# Altium PCB ExtBoard 20Pin.PcbDoc
Units mm, origin at the board's own origin, x right, y up, seen from the top; angles counter-clockwise.
Board outline 152.4 x 101.6 mm, 2 copper layers (Top Layer, Bottom Layer); 9 components, 20 nets, 40 pads, 3 vias.
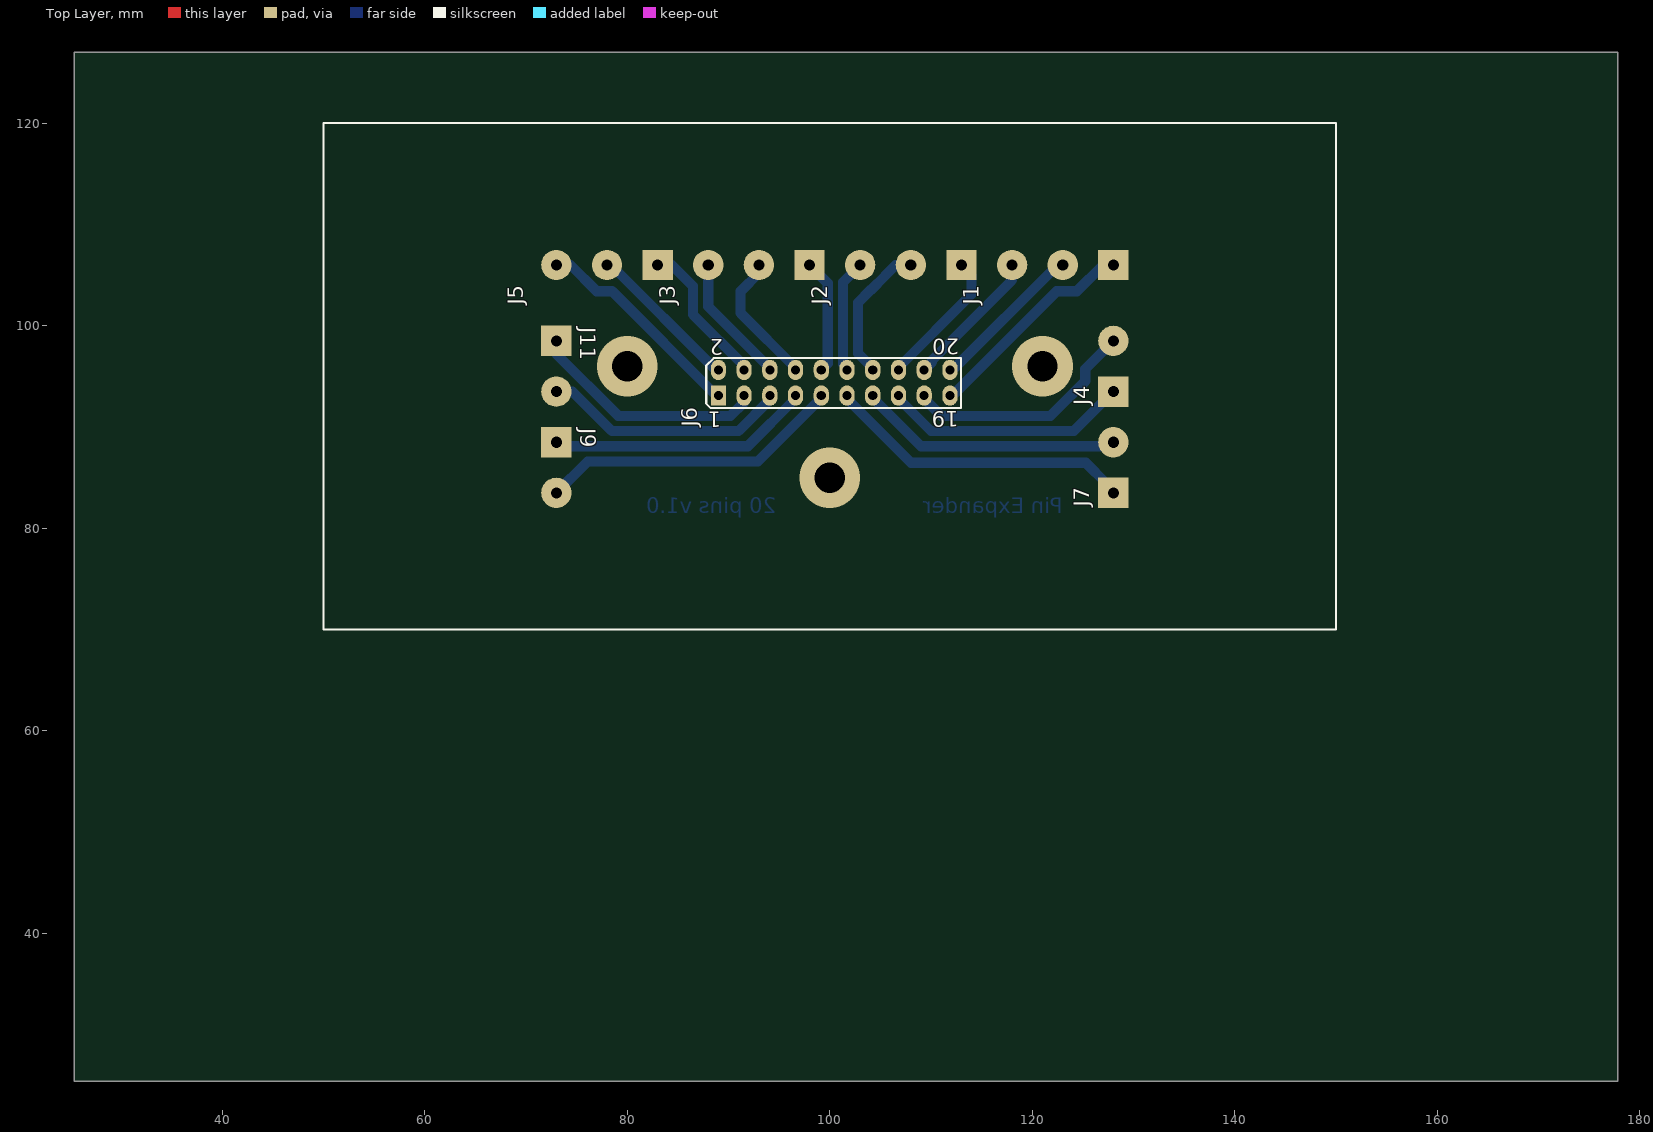
[diagram p0: Top Layer view]
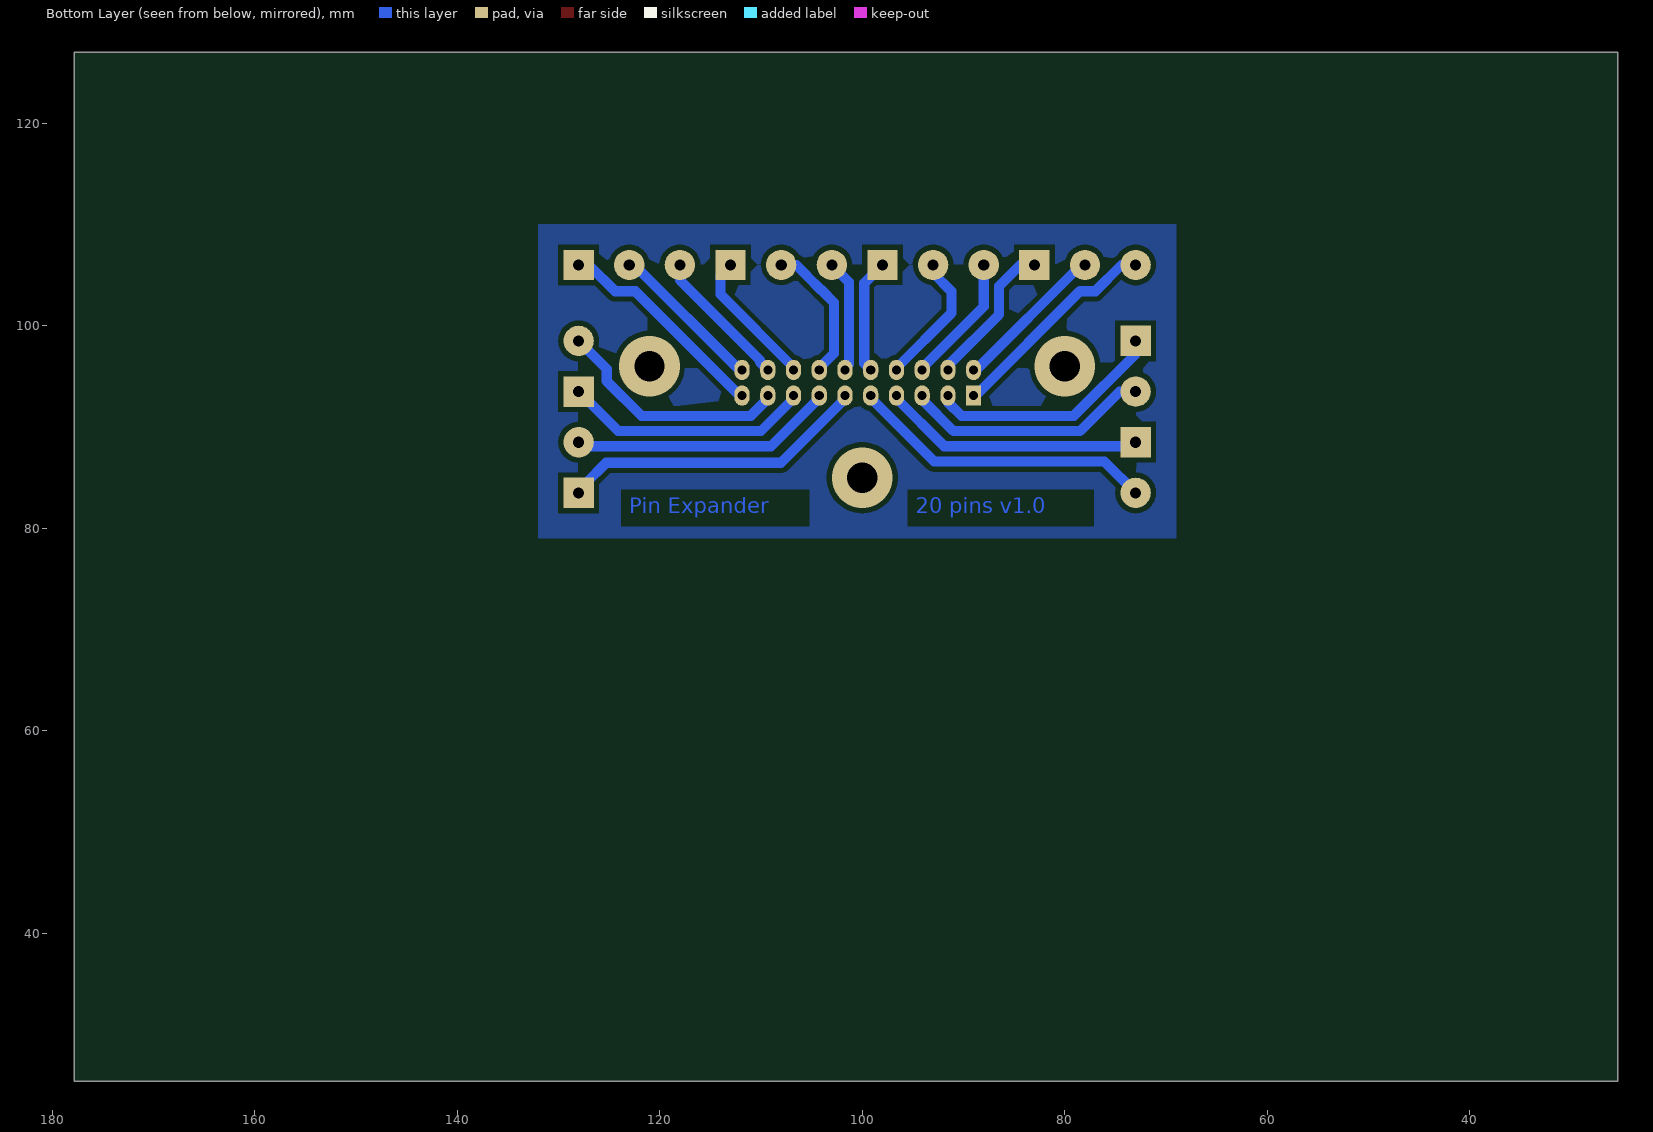
[diagram p1: Bottom Layer view, seen from below]
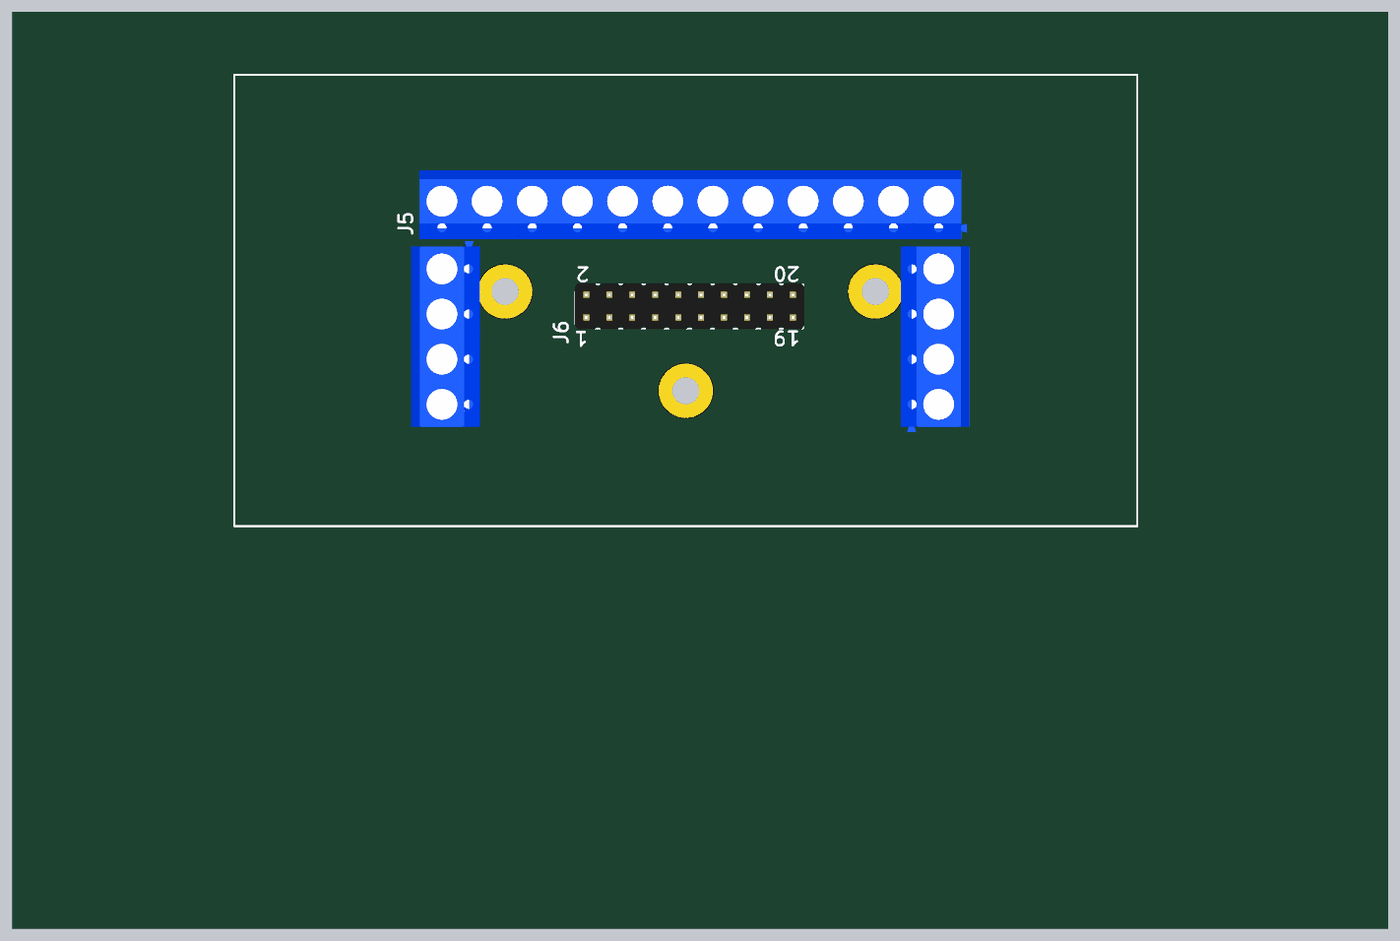
[diagram p2: 3D render of the assembled board from above, using the file's embedded part models]

## Layer stack, top to bottom
Top Solder: solder mask 0.0102, Solder Resist, Dk 3.5
Top Layer: signal copper 0.0356
Dielectric 1: dielectric 0.32, FR-4, Dk 4.8
Bottom Layer: signal copper 0.0356
Bottom Solder: solder mask 0.0102, Solder Resist, Dk 3.5

## Board outline
25.4,25.4 177.8,25.4 177.8,127 25.4,127

## Design rules (kind name [scope] priority, off if disabled: settings)
Clearance [All] p1: gap=0.5
PolygonConnect [All] p1: connectstyle=Relief reliefconductorwidth=0.254 reliefentries=4 polygonreliefangle="90 Angle" airgapwidth=0.254
RoutingVias [All] p1: holewidth=0.711 width=1.27 viastyle="Through Hole" minholewidth=0.711 minwidth=1.27 maxholewidth=0.711 maxwidth=1.27
SolderMaskExpansion [All] p1: expansion=0.102
Width [All] p1: maxlimit=2 minlimit=0.5 preferedwidth=1
29 further rules are at their usual default settings.

## Components (designator, comment, footprint, x,y, rotation, side; value= is the part's Value field where it differs from the comment)
J1 "Connector" "DG301 5mm 3p" 128,106 r180 top
J2 "Connector" "DG301 5mm 3p" 113,106 r180 top
J3 "Connector" "DG301 5mm 3p" 98,106 r180 top
J4 "Connector" "DG301 5mm 2p" 128,93.5 r90 top
J5 "Connector" "DG301 5mm 3p" 83,106 r180 top
J6 "Connector" "LINE 2.54 x 20D (2 x 10)" 89,93.1 r90 top
J7 "Connector" "DG301 5mm 2p" 128,83.5 r90 top
J9 "Connector" "DG301 5mm 2p" 73,88.5 r270 top
J11 "Connector" "DG301 5mm 2p" 73,98.5 r270 top

## Footprints (in the part's own frame and the unit in brackets; to place one, negate y for a bottom-side part, rotate by r counter-clockwise, add the part's x,y. Pads: shape width x height; smd on the part's side, far side on the other; paste and mask are expansions set on the pad)
"DG301 5mm 2p" [mm]
  rect 3x3 hole 1.1: 1(0,0)
  round 3 hole 1.1: 2(5,0)
  body extent -3.1,-3.4 7.5,4.2, height 10
"DG301 5mm 3p" [mm]
  rect 3x3 hole 1.1: 1(0,0)
  round 3 hole 1.1: 2(5,0) 3(10,0)
  body extent -3.1,-3.4 12.5,4.2, height 10
"LINE 2.54 x 20D (2 x 10)" [mm]
  rect 2x1.5 hole 0.9: 1(0,0)
  oval 2x1.5 hole 0.9: 2(2.54,0) 3(0,-2.54) 4(2.54,-2.54) 5(0,-5.08) 6(2.54,-5.08) 7(0,-7.62) 8(2.54,-7.62) 9(0,-10.16) 10(2.54,-10.16) 11(0,-12.7) 12(2.54,-12.7) 13(0,-15.24) 14(2.54,-15.24) 15(0,-17.78) 16(2.54,-17.78) 17(0,-20.32) 18(2.54,-20.32) 19(0,-22.86) 20(2.54,-22.86)
  silkscreen extent -1.2,-23.97 3.7,1.2, body extent -1.27,-24.12 3.81,1.28, height 8.5

## Part data
J1 J2 J3 J5: library part DG301-5.0-3P12, "DG301 series"
J4 J7 J9 J11: library part DG301-5.0-2P12, "DG301 series"
J6: library part "PLD-20 (2 x 10)", "Vert, Dbl line, Male"

## Via types
v1: diameter 6, hole 3, Top Layer to Bottom Layer, 3 vias

## Nets (pads, with @x,y where several pads share a name; then routed paths per layer and width w, separated by ;. In a path a pad name is that pad's centre, name@x,y a point inside that pad or via, vN(x,y) a via of type N, cw(c..) or ccw(c..) an arc to the next point about the centre after c; other vN are vias at no path point)
P1: J5.3 J6.1 | length 21.2
  Bottom Layer w1: J5.3 74.4,106 76.992,103.408 78.508,103.408 J6.1@88.815,93.1
P2: J5.2 J6.2 | length 15.3
  Bottom Layer w1: J5.2 78.4,106 88.7,95.7 88.94,95.7 J6.2
P3: J6.3 J11.1 | length 22.9
  Bottom Layer w1: J11.1 73,97.2 79.1,91.1 90.2,91.1 J6.3@91.54,92.44
P4: J5.1 J6.4 | length 14.7
  Bottom Layer w1: J5.1 84.4,106 86.5,103.9 86.5,101.099 91.54,96.059 J6.4
P5: J6.5 J11.2 | length 24
  Bottom Layer w1: J11.2 74.579,93.5 78.479,89.6 91,89.6 J6.5@94.08,92.68
P6: J3.3 J6.6 | length 12.8
  Bottom Layer w1: J3.3 88,101.905 J6.6@94.172,95.732
P7: J6.7 J9.1 | length 25.7
  Bottom Layer w1: J9.1 73.4,88.1 91.9,88.1 J6.7@96.62,92.82
P8: J3.2 J6.8 | length 13.2
  Bottom Layer w1: J3.2 93,105.2 91.2,103.4 91.2,101.245 J6.8@96.62,95.825
P9: J6.9 J9.2 | length 30
  Bottom Layer w1: J9.2 76.1,86.6 92.9,86.6 J6.9@99.16,92.86
P10: J3.1 J6.10 | length 11.4
  Bottom Layer w1: J3.1 99.8,104.2 99.8,96.28 J6.10
P11: J6.11 J7.1 | length 29.1
  Bottom Layer w1: J6.11@101.7,92.8 108.025,86.475 125.275,86.475 J7.1@127.325,84.425
P12: J2.3 J6.12 | length 11
  Bottom Layer w1: J6.12@101.7,95.825 101.3,96.225 101.3,104.3 J2.3
P13: J6.13 J7.2 | length 25.9
  Bottom Layer w1: J6.13@104.24,92.86 109,88.1 127.6,88.1 J7.2
P14: J2.2 J6.14 | length 14
  Bottom Layer w1: J6.14 104.24,95.825 102.8,97.265 102.8,102.3 104,103.5 104.036,103.5 105.5,104.964 105.5,105 106.5,106 J2.2
P15: J4.1 J6.15 | length 24.2
  Bottom Layer w1: J6.15@106.78,92.82 110,89.6 124.1,89.6 J4.1
P16: J2.1 J6.16 | length 13.8
  Bottom Layer w1: J6.16 106.78,95.88 114,103.1 114,105 J2.1
P17: J4.2 J6.17 | length 23.1
  Bottom Layer w1: J6.17@109.32,92.78 111,91.1 121.8,91.1 125.225,94.525 125.225,95.725 J4.2
P18: J1.3 J6.18 | length 14
  Bottom Layer w1: J6.18 110.11,96.43 110.11,96.615 118,104.505 J1.3
P19: J1.1 J6.19 | length 21.5
  Bottom Layer w1: J6.19 112.1,93.1 122.4,103.4 124.4,103.4 127,106 J1.1
P20: J1.2 J6.20 | length 15.4
  Bottom Layer w1: J6.20 112.14,95.64 122.5,106 J1.2
copper on no net: | length 1.4
  Bottom Layer w1: 127,84.5 128,83.5
  other v1: 100,85 80,96 121,96

## Polygon pours and split planes (outlines as drawn)
no net on Bottom Layer "Top Layer-No Net" (solid, pour order 2): 69,110 132,110 132,79 69,79

## Other copper
Bottom Layer:
  text "20 pins v1.0" at 94.7,81.5 h1.5
  text "Pin Expander" at 123,81.5 h1.5

## Silkscreen, mask and mechanical layers (free items; w line width, h text height)
Top Overlay:
  lines w0.2: 50,70 50,120 150,120 150,70 50,70

## Text inside footprints (layer, text, board x,y; h text height)
J6: Top Overlay "20" at 112.775,98.7 h1.52 r180; Top Overlay "19" at 112.75,91.575 h1.52 r180; Top Overlay "2" at 89.475,98.675 h1.52 r180; Top Overlay "1" at 89.275,91.525 h1.52 r180